# EAGLE board SparkWireInterface (EAGLE 9.7.0)
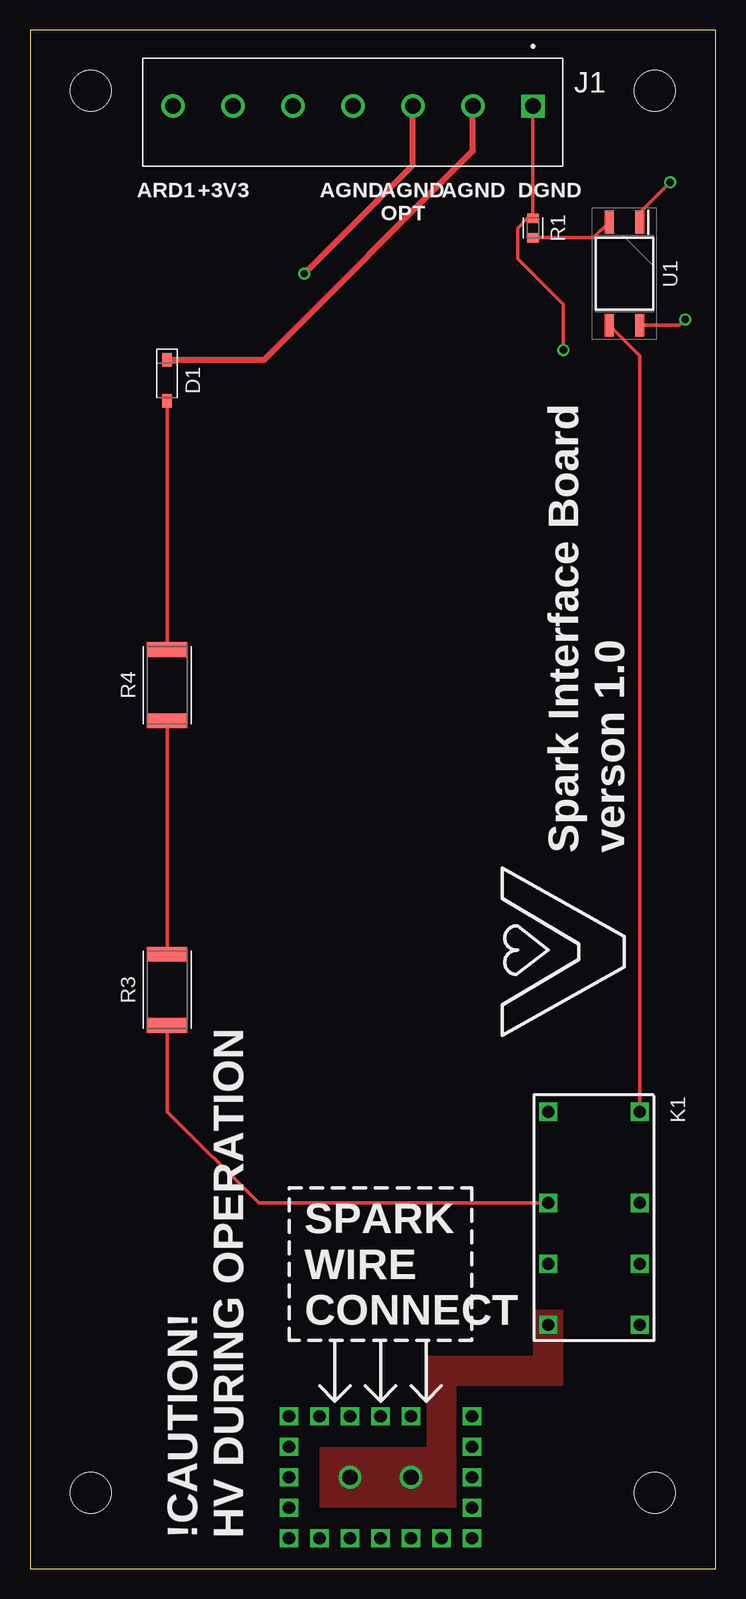
[diagram p0: board, top side]
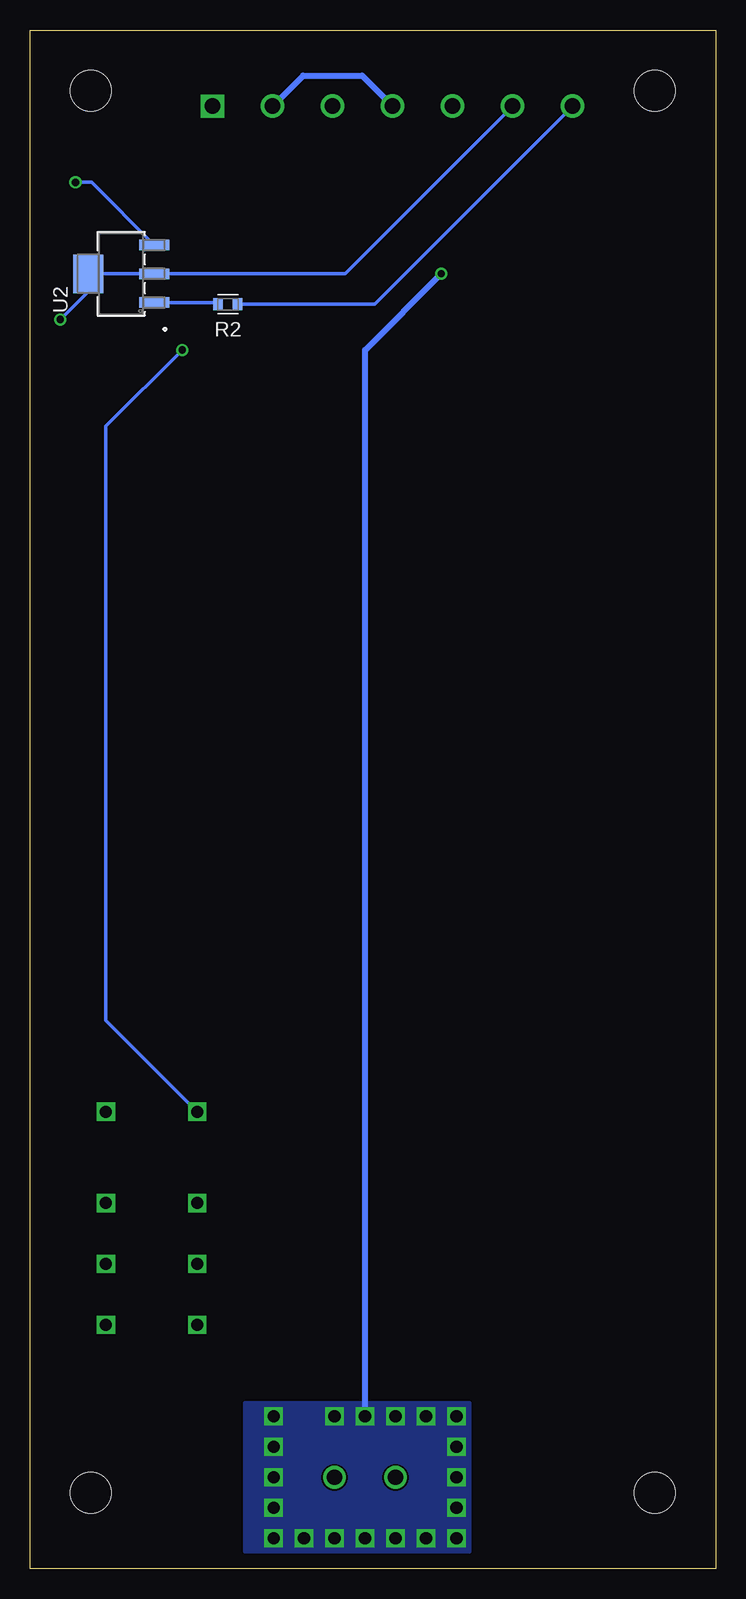
[diagram p1: board, bottom side, seen from below]

Size 57.13 x 128.27 mm. Coordinates in mm from the lower left corner, seen from the top.
Outline: 0,0 57.13,0 57.13,128.27 0,128.27 0,0
Copper layers (1*16): Top 0.035mm / dielectric 1.5mm / Bottom 0.035mm
Design rules "default": minimum track width 6mil, minimum drill 0.35mm, track to track 6mil, track to pad 6mil, pad to pad 6mil, via to via 6mil, smd to smd 6mil, copper to edge 40mil, drill to drill 6mil, minimum pad ring 10mil, minimum via ring 8mil, stop-mask expansion 4mil, vias tented up to drill 0mil, thermal gap 10mil
Holes 3.4 mm at 5.08,6.35 52.07,6.35 52.07,123.19 5.08,123.19

## Footprints (pad centres in the part's own frame; a part is rotated, then mirrored left to right if it is on the bottom)
SOD3715X135 = smd 1.127 x 0.784: 1 -1.722,0; 2 1.722,0
CUI_TB001-500-07BE = drill 1.3 square: 1 0,0 | drill 1.3: 2 5,0; 3 10,0; 4 15,0; 5 20,0; 6 25,0; 7 30,0
J104D2C3VDC.15S = drill 1 square: 1 0,-7.62; 2 0,0; 3 7.62,-7.62; 4 7.62,0; 5 12.7,-7.62; 6 12.7,0; 7 17.78,-7.62; 8 17.78,0
RESC1608X60 = smd 0.799 x 0.974: 1 -0.815,0; 2 0.815,0
RESC6332X71 = smd 1.231 x 3.37: 1 -2.97,0; 2 2.97,0
SOP254P962X315-4N = smd 1.9 x 0.75: 1 -4.3,1.27; 2 -4.3,-1.27; 3 4.3,-1.27; 4 4.3,1.27
SOT-223_ONS = smd 0.889 x 2.489: 1 -2.4,-2.756; 2 0,-2.756; 3 2.4,-2.756 | smd 3.2 x 2.489: 4 0,2.756

## Placement (x,y rotation side)
D1  1N4148W  [SOD3715X135]  11.43,99.06 270 top
J1  TB001-500-07BE  [CUI_TB001-500-07BE]  41.91,121.92 180 top
K1  J104D2C3VDC.15S  [J104D2C3VDC.15S]  50.8,38.1 270 top
R1  330  [RESC1608X60]  41.91,111.76 270 top
R2  3300  [RESC1608X60]  40.64,105.41 180 bottom
R3  10M  [RESC6332X71]  11.43,48.26 90 top
R4  10M  [RESC6332X71]  11.43,73.66 90 top
U1  AQY212GHAX  [SOP254P962X315-4N]  49.53,107.95 270 top
U2  PZTA06SOT-223_ONS  [SOT-223_ONS]  49.53,107.95 90 bottom

## Library data of the parts
D1 = Diode; CATEGORY: Diode; DESCRIPTION: DIODE GEN PURP 100V 300MA SOD123; MANUFACTURER: Diodes Incorporated; SUB-CATEGORY: Rectifier
J1 = ADVANCEDPBTLIB; MANUFACTURER: CUI; STANDARD: Manufacturer Recommendations
K1 = ADVANCEDPBTLIB
R1-R4 = Resistor; CATEGORY: Resistor; SUB-CATEGORY: Fixed
U1 = ADVANCEDPBTLIB; ARROW_PART_NUMBER: AQY212GHAX; ARROW_PRICE-STOCK: https://www.arrow.com/en/products/aqy212ghax/panasonic?region=europe; DESCRIPTION: PANASONIC - AQY212GHAX - MOSFET Relay, SPST-NO, 1.1 A, Gull Wing, 60 V, 0.7 ohm, 5 kV; HEIGHT: 3.15mm; MANUFACTURER_NAME: Panasonic; MANUFACTURER_PART_NUMBER: AQY212GHAX; MOUSER_PART_NUMBER: 667-AQY212GHAX; MOUSER_PRICE-STOCK: https://www.mouser.co.uk/ProductDetail/Panasonic-Industrial-Devices/AQY212GHAX?qs=wKtUvITRiamLwz7hthc4Hg%3D%3D
U2 = ADVANCEDPBTLIB; COPYRIGHT: Copyright (C) 2022 Ultra Librarian. All rights reserved.; DIGI-KEY_PART_NUMBER_1: PZTA06TR-ND; DIGI-KEY_PART_NUMBER_2: PZTA06CT-ND; DIGI-KEY_PART_NUMBER_3: PZTA06DKR-ND; MANUFACTURER_PART_NUMBER: PZTA06; MFR_NAME: onsemi

## Nets
+3V3: J1.6 U1.4 U2.2 U2.4
AGND: J1.3
AGND2: D1.1 J1.2 J1.4
ARD1: J1.7 R2.1
DGND: J1.1 K1.1 R1.1
N$1: K1.2 U1.3
N$6: U1.1 U2.3
N$7: R1.2 U1.2
N$8: R2.2 U2.1
N$9: K1.3 R3.1
N$10: R3.2 R4.1
N$11: D1.2 R4.2
SP_ENTRY: K1.7

## Tracks (layer width: path | path; a pad name or v marks a point on that pad's centre or on a via)
+3V3  (via drill 0.6)
  Top 0.3: U1.4 54.12,103.65 v54.61,104.14
  Bottom 0.3: v54.61,104.14 52.29,106.46 U2.4 U2.2 30.88,107.95 J1.6
AGND  (via drill 0.6, 1.02)
  Top 0.5: v22.86,107.95 31.91,117 J1.3
  Bottom 0.5: v29.21,12.7 29.21,101.6 v22.86,107.95
  other vias: 36.83,12.7 36.83,7.62 36.83,10.16 36.83,5.08 36.83,2.54 34.29,2.54 31.75,2.54 29.21,2.54 26.67,2.54 24.13,2.54 21.59,2.54 21.59,5.08 21.59,7.62 21.59,10.16 24.13,12.7 26.67,12.7 31.75,12.7 21.59,12.7
  pour Bottom: 39.22,1.42 39.22,13.82 20.47,13.82 20.47,1.42
AGND2
  Top 0.5: D1.1 19.5,100.78 36.91,118.19 J1.2
  Bottom 0.5: J1.2 34.37,124.46 29.45,124.46 J1.4
ARD1
  Bottom 0.3: R2.1 28.42,105.41 J1.7
DGND  (via drill 0.6)
  Top 0.3: v44.45,101.6 44.45,105.41 40.64,109.22 40.64,111.76 41.45,112.58 R1.1 J1.1
  Bottom 0.3: K1.1 50.8,45.72 50.8,95.25 v44.45,101.6
N$1
  Top 0.3: U1.3 50.8,101.11 K1.2
N$6  (via drill 0.6)
  Top 0.3: U1.1 50.8,113.03 v53.34,115.57
  Bottom 0.3: v53.34,115.57 51.99,115.57 U2.3
N$7
  Top 0.3: U1.2 46.95,110.94 R1.2
N$8
  Bottom 0.3: R2.2 41.59,105.55 U2.1
N$9
  Top 0.3: K1.3 19.05,30.48 11.43,38.1 R3.1
N$10
  Top 0.3: R3.2 R4.1
N$11
  Top 0.3: R4.2 D1.2
SP_ENTRY  (via drill 1.27)
  other vias: 26.67,7.62 31.75,7.62
  pour Top (no thermals): 33.15,10.08 33.1,10.03 33.05,10.01 24.28,10.01 24.28,5.23 35.41,5.23 35.41,15.27 35.43,15.32 35.48,15.37 35.53,15.39 44.3,15.39 44.3,21.44 42.06,21.44 42.06,17.75 42.04,17.7 41.99,17.65 41.94,17.63 33.17,17.63 33.17,10.13

## Text on the board
tPlace: ARD1 | +3V3 | AGND | AGND | DGND | AGND / OPT | Spark Interface Board / verson 1.0 | SPARK / WIRE / CONNECT | \!CAUTION\! / HV DURING OPERATION